# Altium PCB Control_IR_Raspberry.PcbDoc
Units mm, origin at the board's own origin, x right, y up, seen from the top; angles counter-clockwise.
Board outline 35.73 x 60.6 mm, 2 copper layers (Top Layer, Bottom Layer); 21 components, 21 nets, 72 pads, 0 vias.
Unrouted connection lines stored in the file: 2.
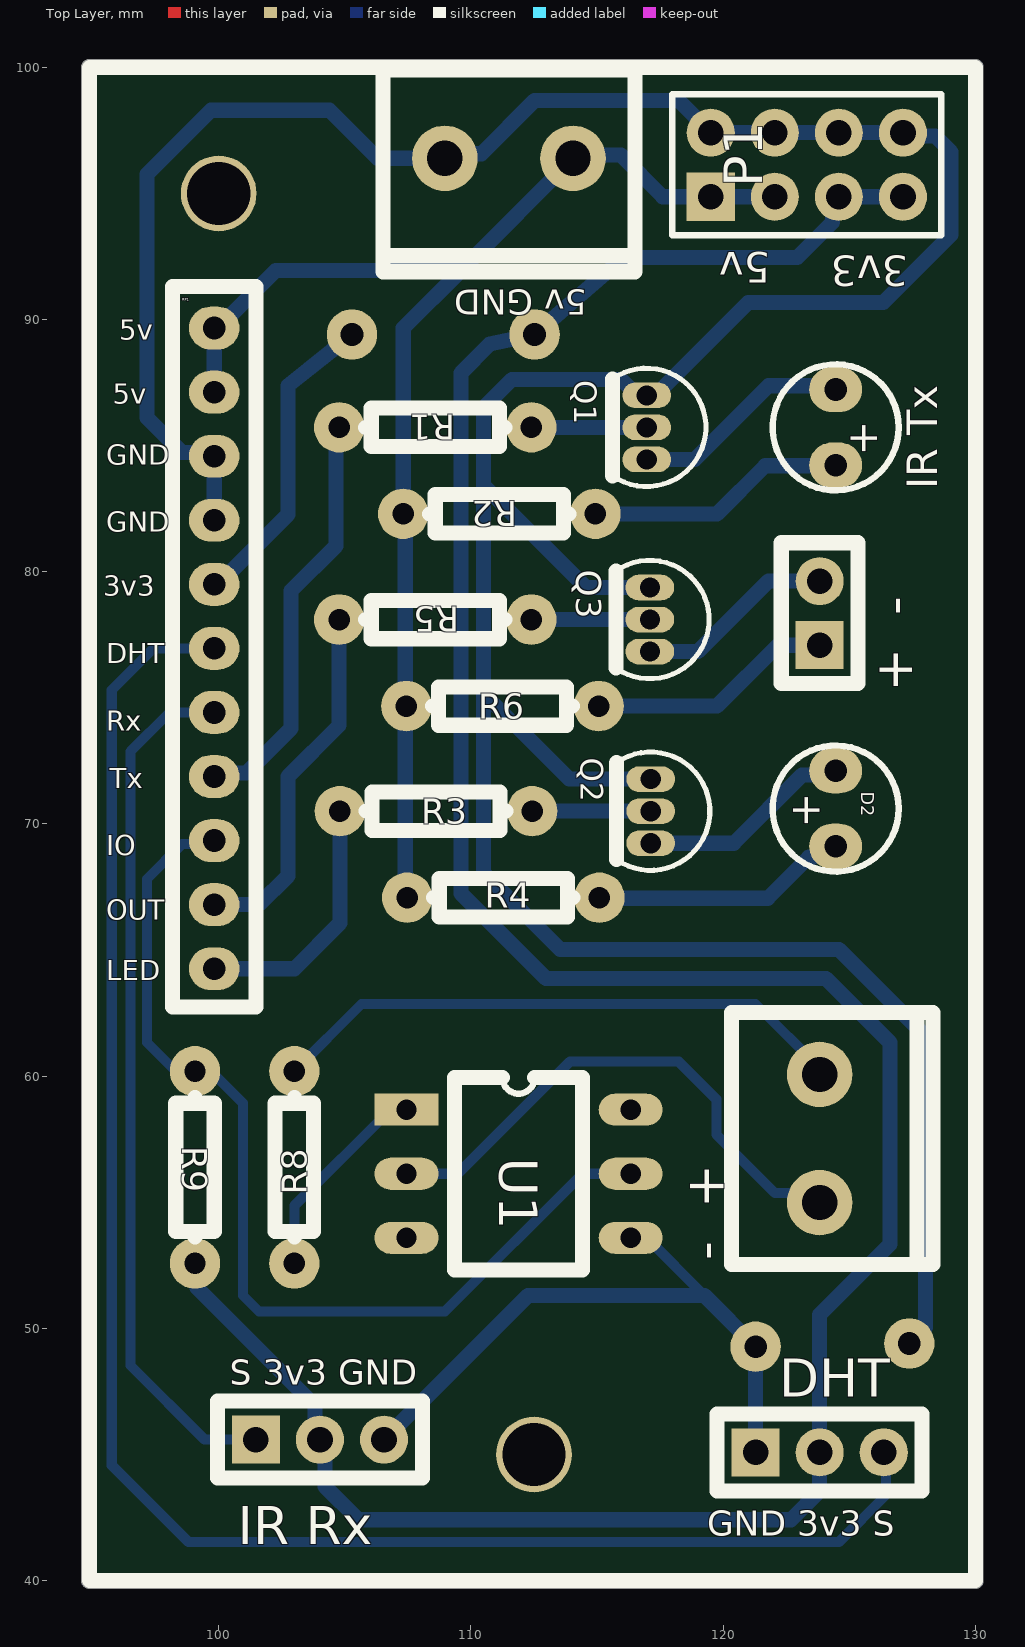
[diagram p0: Top Layer view]
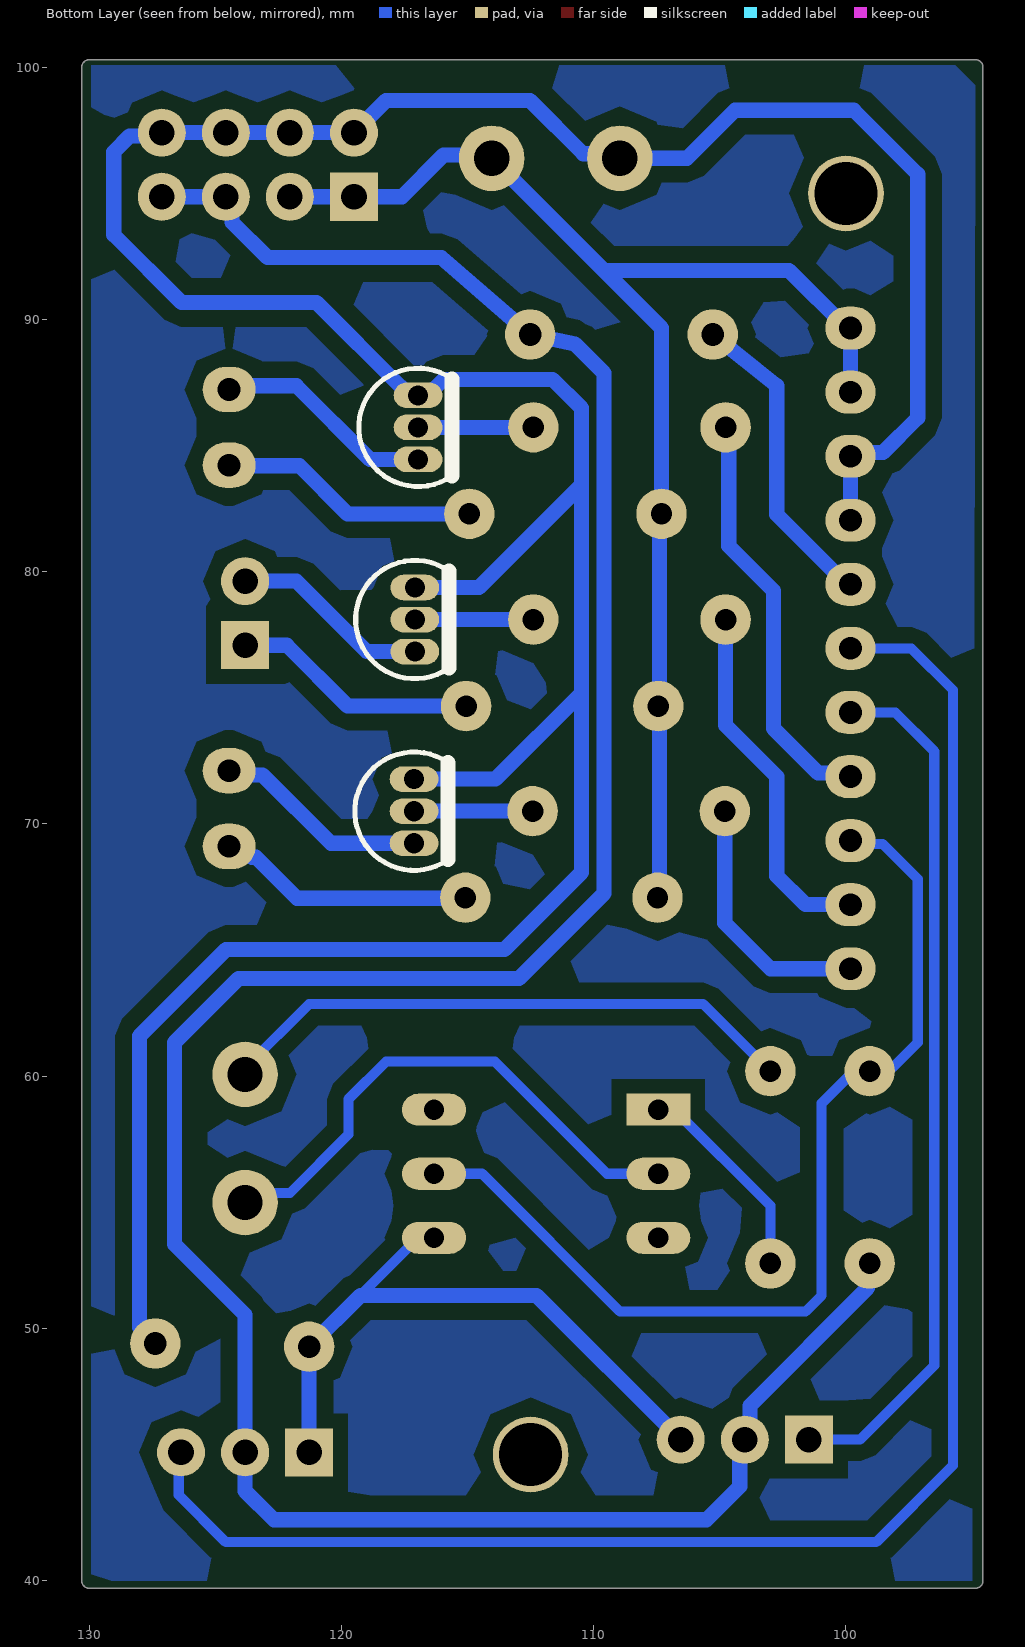
[diagram p1: Bottom Layer view, seen from below]

## Layer stack, top to bottom
Top Solder: solder mask 0.0102, Solder Resist, Dk 3.5
Top Layer: signal copper 0.0356
Dielectric 1: dielectric 0.32, FR-4, Dk 4.8
Bottom Layer: signal copper 0.0356
Bottom Solder: solder mask 0.0102, Solder Resist, Dk 3.5

## Board outline
94.569,40 94.569,100 cw(c94.869,100) 94.869,100.3 130,100.3 cw(c130,100) 130.3,100 130.3,40 cw(c130,40) 130,39.7 95,39.7 cw(c95,40) 94.934,39.707 94.935,39.707 cw(c94.869,40)

## Design rules (kind name [scope] priority, off if disabled: settings)
Clearance [All] p1: gap=0.1 ignorepadtopadclearanceinfootprint=FALSE
PolygonConnect [All] p1: connectstyle=Relief reliefconductorwidth=0.254 reliefentries=4 polygonreliefangle="90 Angle" airgapwidth=0.254
RoutingVias [All] p1: holewidth=0.711 width=1.27 viastyle="Through Hole" minholewidth=0.711 minwidth=1.27 maxholewidth=0.711 maxwidth=1.27
SolderMaskExpansion [All] p1: expansion=0.102 istentingtop=FALSE
Width [All] p1: maxlimit=2 minlimit=0.254 preferedwidth=0.254 toplayer_maxwidth=0.254 minimp=50.000000 maximp=50.000000 favimp=50.000000
30 further rules are at their usual default settings.

## Components (designator, comment, footprint, x,y, rotation, side; value= is the part's Value field where it differs from the comment)
"5v GND" "POWER SUPPLY  5V" "bornera chica" 106.506,91.893 r0 top (schematic designator B2)
"+  -" "Header 2" "Header 2" 123.825,77.089 r90 top (schematic designator P2)
"-  +" "bornera" "bornera chica" 128.325,52.531 r90 top (schematic designator B1)
D2 "LED0" led5mm 124.46,70.612 r90 top
"GND 3v3 S" "DHT11/22" "Header 3" 121.285,45.085 r0 top (schematic designator S1)
"IR Tx" "LED0" led5mm 124.46,85.725 r90 top (schematic designator D1)
P1 "Header 4x2" "Header 4x2" 119.507,94.869 r0 top
Q1 "NPN" TO92 116.967,85.725 r180 top
Q2 "NPN" TO92 117.125,70.509 r180 top
Q3 "NPN" TO92 117.094,78.105 r180 top
R1 "Res1" AXIAL-0.3 108.585,85.725 r0 top value=10K
R2 "Res1" AXIAL-0.3 111.125,82.296 r0 top value=330
R3 "Res1" AXIAL-0.3 108.616,70.509 r0 top value=10K
R4 "Res1" AXIAL-0.3 111.283,67.08 r180 top value=330
R5 "Res1" AXIAL-0.3 108.585,78.105 r0 top value=10K
R6 "Res1" AXIAL-0.3 111.252,74.676 r180 top value=330
R8 "Res1" AXIAL-0.3 102.997,56.388 r90 top value=330
R9 "Res1" AXIAL-0.3 99.06,56.388 r270 top value=10K
RP1 "Raspberry GPIO" "entradas de placa" 99.822,89.662 r0 top
"S 3v3 GND" "IR_receiver" "Header 3" 101.473,45.593 r0 top (schematic designator S2)
U1 "4N35" DIP6 107.442,58.674 r0 top

## Footprints (in the part's own frame and the unit in brackets; to place one, negate y for a bottom-side part, rotate by r counter-clockwise, add the part's x,y. Pads: shape width x height; smd on the part's side, far side on the other; paste and mask are expansions set on the pad)
AXIAL-0.3 [mm] "Axial Device, Thru-Hole; 2 Leads; 0.3 in Pin Spacing"
  round 2 hole 0.85: 1(-3.81,0) 2(3.81,0)
  silkscreen extent -2.77,-0.76 2.77,0.76
"bornera chica" [mm]
  round 2.6 hole 1.4: 1(2.46,4.5) 2(7.54,4.5)
  silkscreen extent 0,0 10,8
DIP6 [mm]
  rect 2.54x1.27 hole 0.8: 1(0,0)
  oval 2.54x1.27 hole 0.8: 2(0,-2.54) 3(0,-5.08) 4(8.89,-5.08) 5(8.89,-2.54) 6(8.89,0)
  silkscreen extent 1.91,-6.35 6.98,1.27, body extent 0.03,-6.35 8.86,1.29, height 5.4
"entradas de placa" [mm]
  oval 2x1.7 hole 0.9: 1(0,0) 2(0,-2.54) 3(0,-5.08) 4(0,-7.62) 5(0,-10.16) 6(0,-12.7) 7(0,-15.24) 8(0,-17.78) 9(0,-20.32) 10(0,-22.86) 11(0,-25.4)
  silkscreen extent -1.65,-26.92 1.65,1.65
"Header 2" [mil] "Connector; Header; 2 Position; Solder Pad 35mil"
  rect 75x75 hole 40: 1(0,0)
  round 75 hole 40: 2(100,0)
  silkscreen extent -60,-60 160,60, body extent -50,-50 150,50, height 330
"Header 3" [mil] "Connector; Header; 3 Position; Solder Pad 35mil"
  rect 75x75 hole 40: 1(0,0)
  round 75 hole 40: 2(100,0) 3(200,0)
  silkscreen extent -60,-60 260,60, body extent -50,-50 250,50, height 83
"Header 4x2" [mil] "Connector; Header; 8 Position; 2 Rows; Solder Pad 35mil"
  rect 75x75 hole 40: 1(0,0)
  round 75 hole 40: 2(0,100) 3(100,0) 4(100,100) 5(200,0) 6(200,100) 7(300,0) 8(300,100)
  silkscreen extent -60,-60 360,160, body extent -50,-50 350,150, height 83
led5mm [mm]
  oval 1.8x2.1 hole 0.9: 1(-1.5,0) 2(1.5,0)
  silkscreen extent -2.5,-2.5 2.5,2.5
TO92 [mil] "TO, Flat Index; 3 In-Line, Axial Leads; Body Dia. 4.6mm; Leads 0.53 x 0.39 mm (max)"
  oval 76x40 hole 31.5: 1(0,50) 2(0,0) 3(0,-50)
  silkscreen extent -92,-92 53,92, body extent -89,-89 49,89, height 315

## Part data
"5v GND": library part bornera
"+  -": "Header, 2-Pin", LatestRevisionDate=17-Jul-2002, LatestRevisionNote="Re-released for DXP Platform.", Publisher="Altium Limited"
D2 "IR Tx": "Typical INFRARED GaAs LED", LatestRevisionDate=08-Jul-2005, LatestRevisionNote="Mech Layer 1 removed.", PackageDescription="LED; 2 Leads", PackageReference=LED-0, Published=8-Jun-2000, Publisher="Altium Limited"
P1: "Header, 8-Pin, 2-Row", LatestRevisionDate=17-Jul-2002, LatestRevisionNote="Re-released for DXP Platform.", Publisher="Altium Limited"
Q1 Q2 Q3: "NPN Bipolar Transistor", Code_JEDEC=TO-226-AA, LatestRevisionDate=17-Jul-2002, LatestRevisionNote="Re-released for DXP Platform.", PackageDescription="TO, Flat Index; 3 In-Line, Axial Leads; Body Dia. 4.8mm; Leads 0.55 x 0.51 mm (max)", PackageReference=TO-226-AA, Published=8-Jun-2000, Publisher="Altium Limited"
R1 R2 R3 R4 R5 R6 R8 R9: "Resistor", LatestRevisionDate=17-Jul-2002, LatestRevisionNote="Re-released for DXP Platform.", PackageDescription="Axial Device, Thru-Hole; 2 Leads; 0.3 in Pin Spacing", PackageReference=AXIAL-0.3, Published=8-Jun-2000, Publisher="Altium Limited"
U1: "Opto Couple", ComponentLink1Description="Digikey Part Link", ComponentLink2Description="Open Datasheet", ComponentLink2URL=H:\LIBRARY\LIBRARY.Datasheet\, Published=13-April-2009, Publisher="Hoang Nguyen", Vendor=Digikey

## Free pads (board coordinates)
  round 2 hole 0.9: 4(112.522,89.408) 5(105.283,89.408) 6(127.381,49.403) 7(121.285,49.276)
  round 3 hole 2.5: 9(100,95) 10(112.5,45)

## Nets (pads, with @x,y where several pads share a name; then routed paths per layer and width w, separated by ;. In a path a pad name is that pad's centre, name@x,y a point inside that pad or via, vN(x,y) a via of type N, cw(c..) or ccw(c..) an arc to the next point about the centre after c; other vN are vias at no path point)
3v3: "GND 3v3 S.2" "S 3v3 GND.2" P1.5 P1.7 pad.4 pad.5 R9.2 RP1.5 | length 123.7
  Bottom Layer w0.6: R9.2@98.933,52.533 99.147,52.319 99.147,51.602 103.811,46.938 103.811,45.795 104.214,45.392 104.214,43.741 105.537,42.418 122.682,42.418 123.825,43.561 123.825,45.085 123.825,50.546 126.619,53.34 126.619,61.341 124.079,63.881 112.971,63.881 109.601,67.251 109.601,87.884 110.744,89.027 pad.4 116.037,92.456 122.936,92.456 124.337,93.857 124.337,94.619 P1.5 P1.7 ; RP1.5 99.972,79.502 102.743,82.273 102.743,87.376 pad.5
5v: "5v GND.2" P1.1 P1.3 R2.1 R4.2 R6.2 RP1.1 RP1.2 | length 55.8
  Bottom Layer w0.6: RP1.2 RP1.1 99.972,89.662 102.258,91.948 109.601,91.948 ; R2.1@107.315,82.418 107.315,84.074 ; R4.2 107.394,67.159 107.394,74.676 107.394,82.217 R2.1 107.315,84.074 ; P1.3 P1.1 117.602,94.869 115.951,96.52 114.173,96.52 109.601,91.948 ; 107.315,84.074 107.315,89.662 109.601,91.948
GND: "5v GND.1" "GND 3v3 S.1" "S 3v3 GND.3" P1.2 P1.4 P1.6 P1.8 pad.6 pad.7 Q1.3 Q2.3 Q3.3 RP1.3 RP1.4 U1.4 | length 169.6
  Bottom Layer w0.4: U1.4 116.967,53.594 119.253,51.308
  Bottom Layer w0.6: RP1.4 RP1.3 99.681,84.723 98.538,84.723 97.155,86.106 97.155,95.758 99.695,98.298 104.394,98.298 106.299,96.393 108.966,96.393 109.145,96.572 110.415,96.572 112.522,98.679 118.237,98.679 P1.2 P1.4 P1.6 P1.8 127.265,97.271 128.408,97.271 129.032,96.647 129.032,93.363 126.347,90.678 120.995,90.678 117.632,87.316 117.312,86.995 Q1.3 116.585,86.995 115.95,87.63 111.633,87.63 110.49,86.487 110.49,83.439 ; 106.553,45.593 112.268,51.308 119.253,51.308 pad.7 121.285,45.085 ; Q3.3 114.554,79.375 110.49,83.439 ; Q2.3 113.895,71.779 110.49,75.184 ; pad.6 128.016,50.038 128.016,61.595 124.587,65.024 113.538,65.024 110.49,68.072 110.49,75.184 ; 110.49,75.184 110.49,83.439
"GPIO 2": "GND 3v3 S.3" RP1.6 | length 69.9
  Bottom Layer w0.4: RP1.6 97.409,76.962 95.758,75.311 95.758,44.577 98.806,41.529 124.587,41.529 126.453,43.395 126.453,44.997 126.365,45.085
"GPIO 10": R5.1 RP1.10 | length 14.4
  Bottom Layer w0.6: RP1.10 101.6,66.802 102.743,67.945 102.743,71.882 104.775,73.914 R5.1
"GPIO 17": R1.1 RP1.8 | length 16.6
  Bottom Layer w0.6: RP1.8 99.963,72.023 101.106,72.023 102.87,73.787 102.87,79.248 104.648,81.026 104.648,85.598 R1.1
"GPIO 18": "S 3v3 GND.1" RP1.7 | length 34.5
  Bottom Layer w0.4: RP1.7 98.044,74.422 96.501,72.879 96.501,48.533 99.441,45.593 101.473,45.593
"GPIO 22": R9.1 RP1.9 U1.5 | length 40.7
  Bottom Layer w0.4: RP1.9 99.693,69.213 98.55,69.213 97.155,67.818 97.155,61.341 98.171,60.325 99.568,60.325 99.695,60.198 100.965,58.928 100.965,51.308 101.6,50.673 108.966,50.673 114.427,56.134 U1.5 ; U1.5@116.332,55.88 U1.5@116.967,55.88
"GPIO 27": R3.1 RP1.11 | length 10.2
  Bottom Layer w0.6: RP1.11 102.997,64.262 104.806,66.071 R3.1
NetB1_1: "-  +.1" U1.2 | length 21.4
  Bottom Layer w0.4: U1.2 109.474,56.134 113.919,60.579 118.237,60.579 119.729,59.087 119.729,57.69 122.047,55.372 122.691,55.372 122.727,55.335 123.481,55.335 123.825,54.991
NetB1_2: "-  +.2" R8.2 | length 23.2
  Bottom Layer w0.4: R8.2 105.664,62.865 121.285,62.865 123.825,60.325 123.825,60.071
NetD1_1: "IR Tx.1" R2.2 | length 10.3
  Bottom Layer w0.6: R2.2 119.761,82.296 121.666,84.201 124.436,84.201 124.46,84.225
NetD1_2: "IR Tx.2" Q1.1 | length 8.8
  Bottom Layer w0.6: Q1.1 118.872,84.455 121.793,87.376 124.309,87.376 124.46,87.225
NetD2_1: D2.1 R4.1 | length 9.7
  Bottom Layer w0.6: R4.1 115.117,67.056 121.769,67.056 123.395,68.682 123.555,68.682 123.825,68.952 D2.1@123.825,69.112
NetD2_2: D2.2 Q2.1 | length 8.3
  Bottom Layer w0.6: Q2.1 120.42,69.239 123.129,71.948 123.756,71.948 123.825,72.017 D2.2@123.825,72.112 ; D2.2 D2.2@124.81,72.112
NetP2_1: "+  -.1" R6.1 | length 9.8
  Bottom Layer w0.6: R6.1 119.761,74.676 122.174,77.089 123.825,77.089
NetP2_2: "+  -.2" Q3.1 | length 7.9
  Bottom Layer w0.6: Q3.1 118.999,76.835 121.793,79.629 123.825,79.629
NetQ1_2: Q1.2 R1.2 | length 4.6
  Bottom Layer w0.6: R1.2 Q1.2
NetQ2_2: Q2.2 R3.2 | length 4.7
  Bottom Layer w0.6: R3.2 Q2.2
NetQ3_2: Q3.2 R5.2 | length 4.7
  Bottom Layer w0.6: R5.2 Q3.2
NetR8_1: R8.1 U1.1 | length 8.3
  Bottom Layer w0.4: R8.1 102.997,54.864 106.807,58.674 U1.1
pads on no net: U1.3 U1.6

## Polygon pours and split planes (outlines as drawn)
no net on Bottom Layer "NONET_L02_P003" (solid, pour order 3): 94.996,40.005 129.921,40.005 130.048,40.132 129.921,40.259 129.921,100.076 95.123,100.076 94.869,99.822

## Silkscreen, mask and mechanical layers (free items; w line width, h text height)
Top Overlay:
  lines w0.6: 95,40 130,40 130,100 94.869,100 94.869,40 100,40
  text "5v" at 121.874,92.664 h1.2 r180
  text "3v3" at 127.335,92.537 h1.2 r180
  text "5v" at 96.058,89.2 h0.8
  text "5v" at 95.804,86.66 h0.8
  text "GND" at 95.55,84.247 h0.8
  text "GND" at 95.55,81.58 h0.8
  text "3v3" at 95.423,79.04 h0.8
  text "DHT" at 95.55,76.373 h0.8
  text "Rx" at 95.55,73.706 h0.8
  text "Tx" at 95.677,71.42 h0.8
  text "IO" at 95.55,68.753 h0.8
  text "OUT" at 95.55,66.213 h0.8
  text "LED" at 95.55,63.8 h0.8
  text "DHT" at 122.22,47.29 h1.5
  text "IR Rx" at 100.757,41.448 h1.5

## Text inside footprints (layer, text, board x,y; h text height)
D2: Top Overlay "+" at 123.825,69.85 h1.2 r90
"IR Tx": Top Overlay "+" at 126.111,84.606 h1.2 r90